# Altium PCB PCB1.PcbDoc
Units mil, origin at the board's own origin, x right, y up, seen from the top; angles counter-clockwise.
Board outline 1566.93 x 1488.19 mil, 4 copper layers (Top Layer, Int1 (GND), Int2 (PWR), Bottom Layer), stack 62.449 mil thick; 29 components, 72 nets, 226 pads, 76 vias.
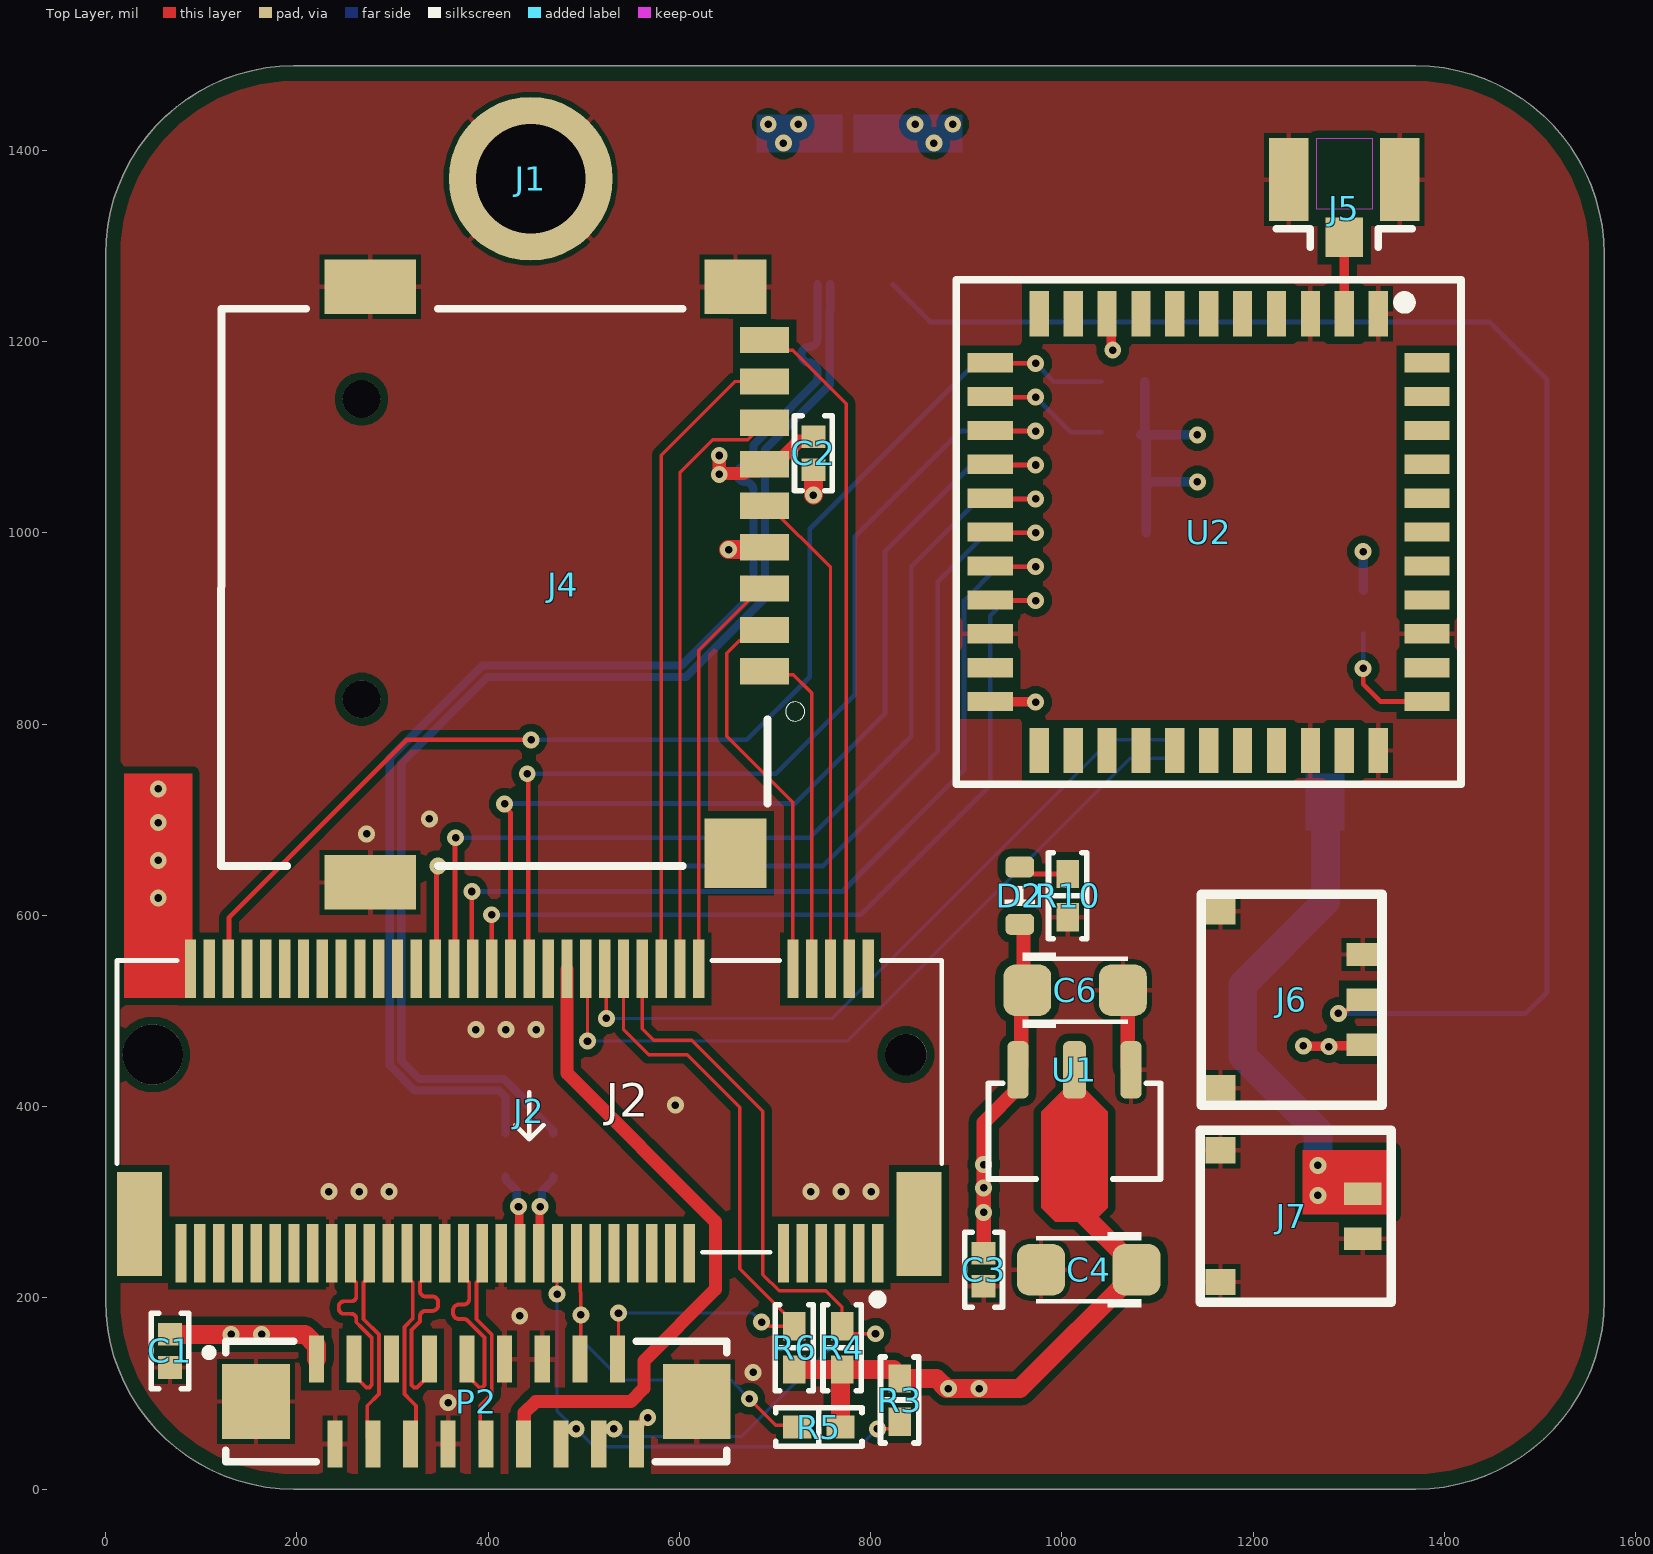
[diagram p0: Top Layer view]
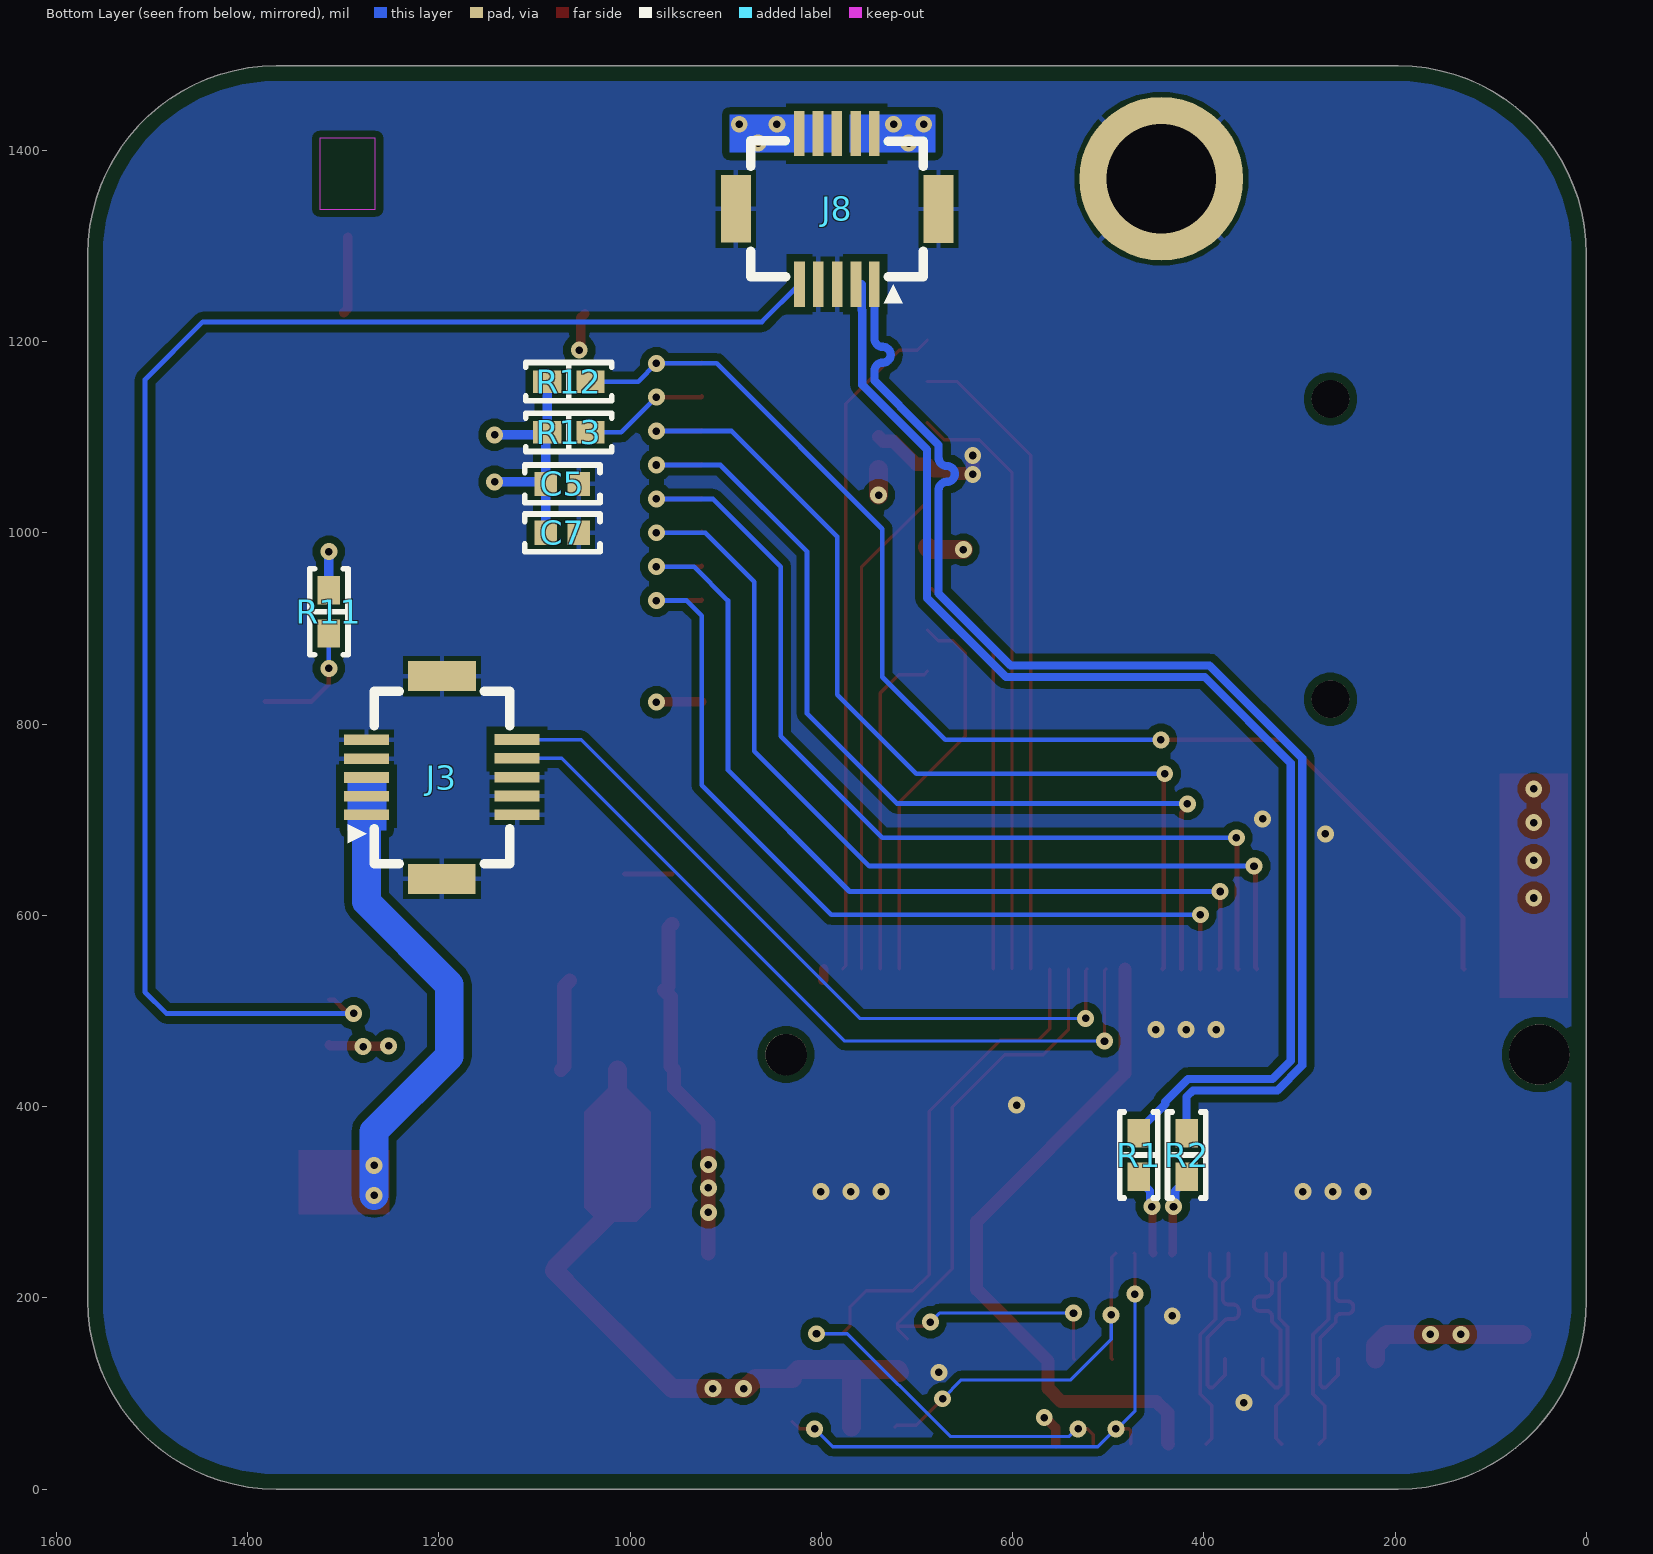
[diagram p1: Bottom Layer view, seen from below]
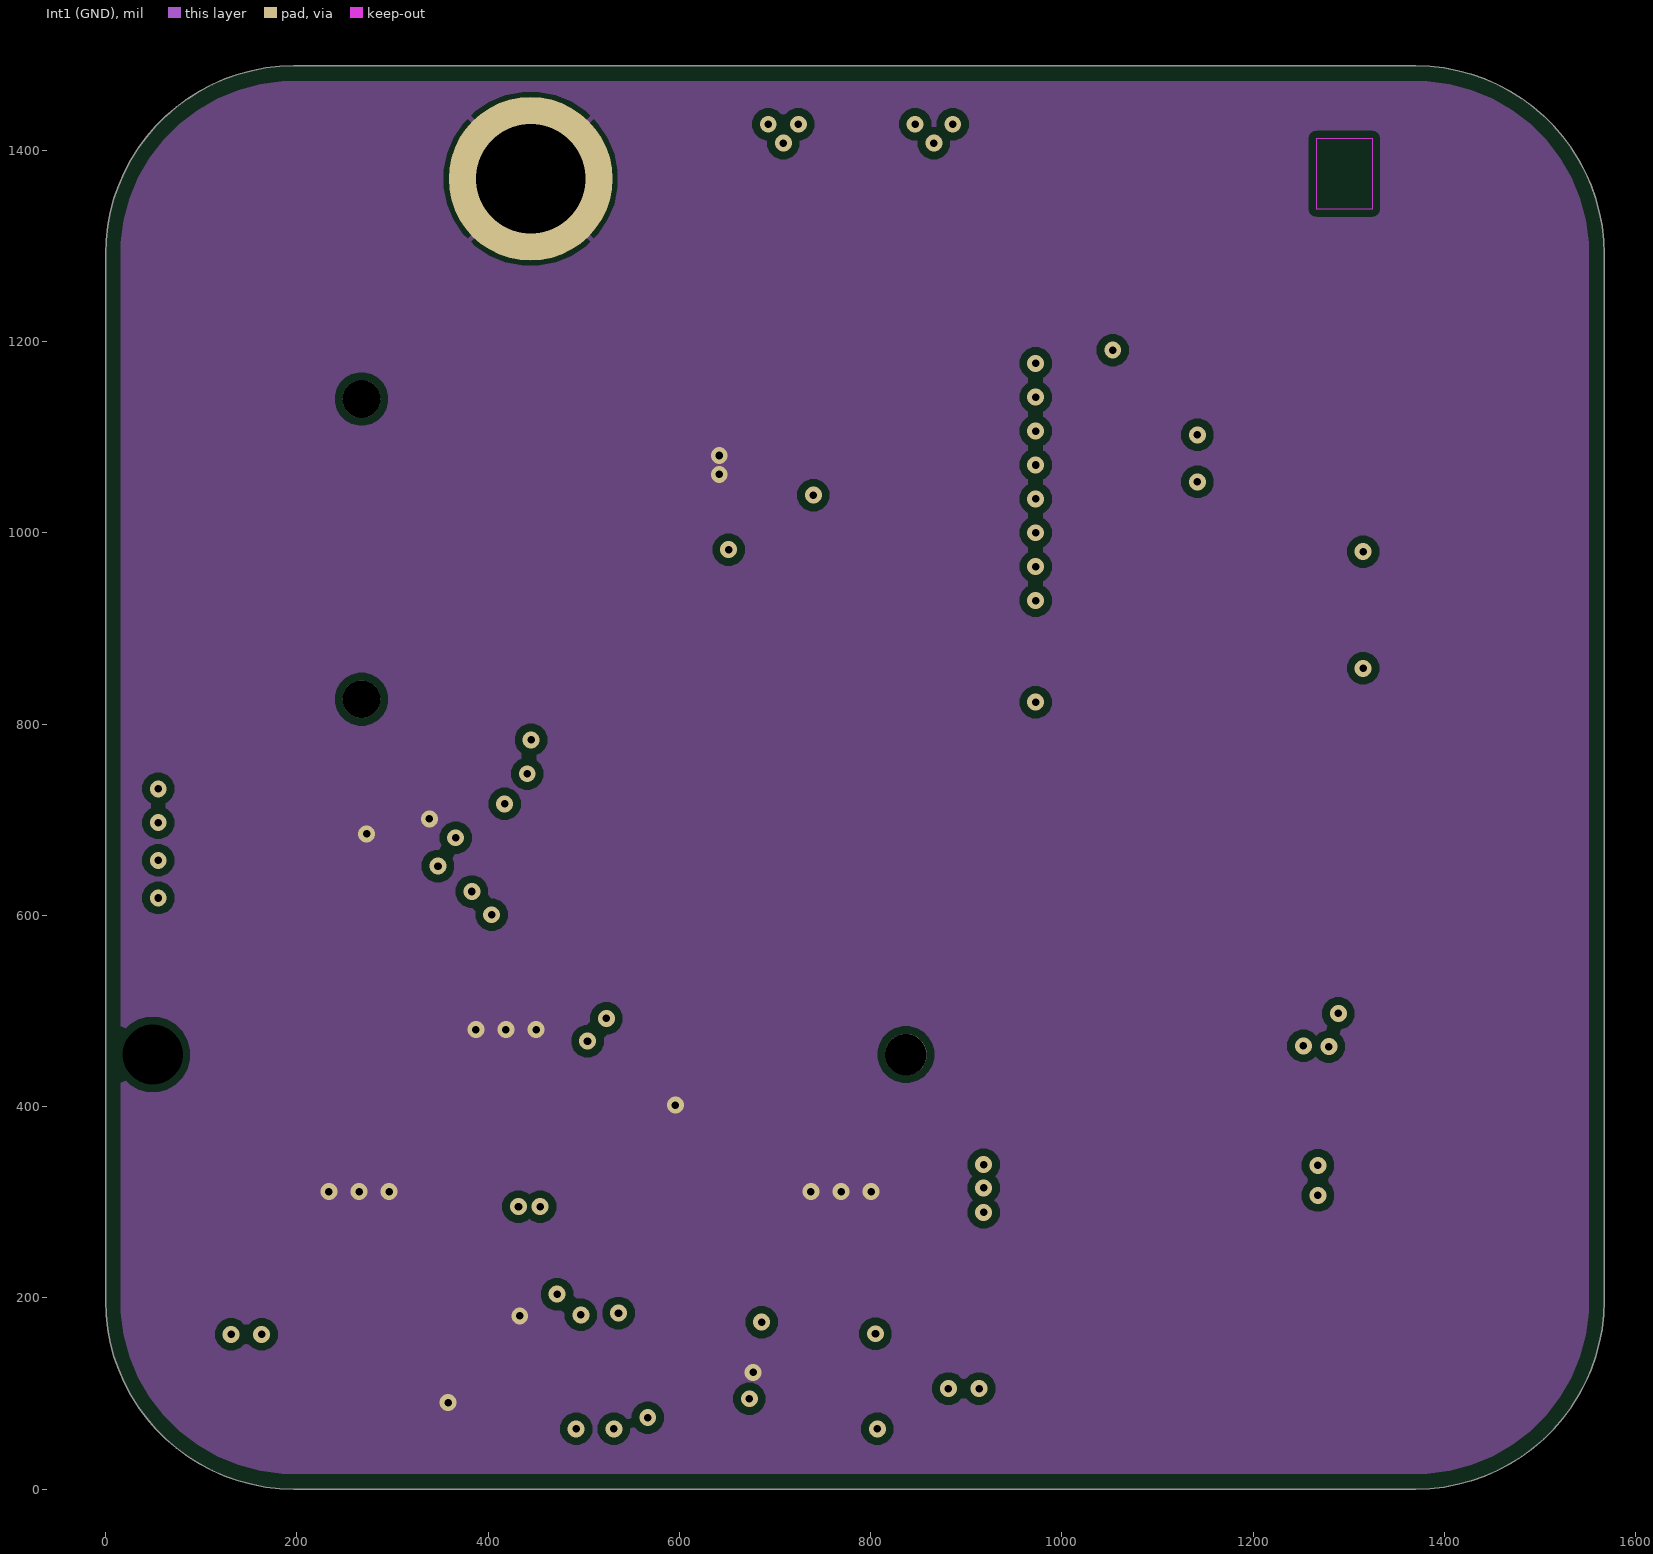
[diagram p2: Int1 (GND)]
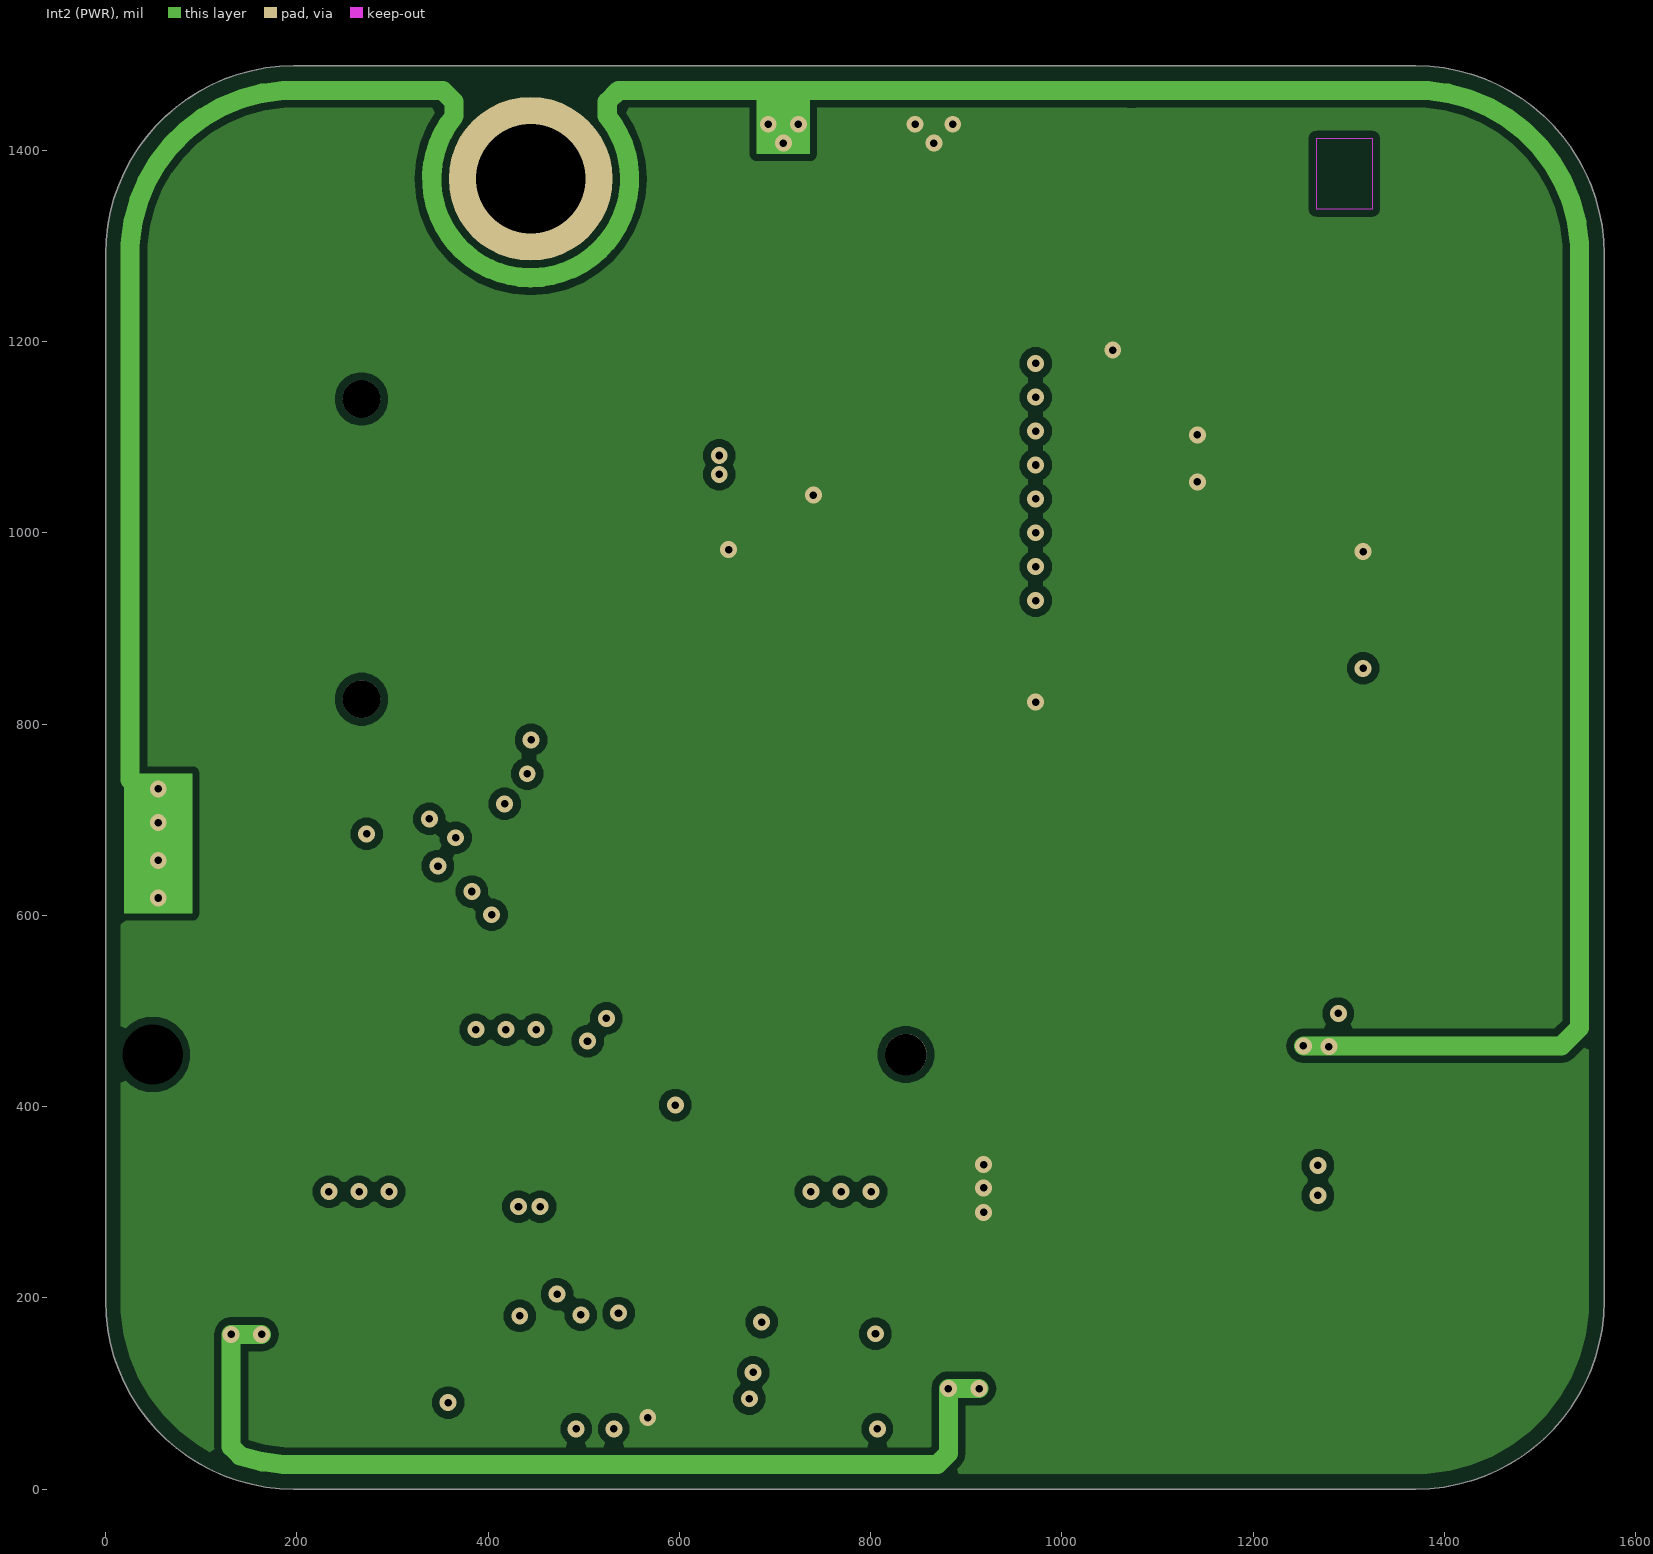
[diagram p3: Int2 (PWR)]

## Layer stack, top to bottom
Top Solder: solder mask 0.6, SM-001, Dk 3.8
Top Layer: signal copper 1.378
Dielectric 1: prepreg 8.284, PP-017, Dk 4.5
Int1 (GND): signal copper 0.598
Dielectric 2: core 41.929, Core-039, Dk 4.48
Int2 (PWR): signal copper 0.598
Dielectric 3: prepreg 8.284, PP-017, Dk 4.5
Bottom Layer: signal copper 1.378
Bottom Solder: solder mask 0.6, SM-001, Dk 3.8

## Board outline
0,196.85 0,1291.34 cw(c196.85,1291.34) 196.85,1488.19 1370.08,1488.19 cw(c1370.08,1291.34) 1566.93,1291.34 1566.93,196.85 cw(c1370.08,196.85) 1370.08,0 196.85,0 cw(c196.85,196.85)

## Design rules (kind name [scope] priority, off if disabled: settings)
BoardOutlineClearance [All] p1: gap=15.75 ignorepadtopadclearanceinfootprint=FALSE
Clearance [All] p1: gap=7.87 ignorepadtopadclearanceinfootprint=FALSE except(0: Arc-Text Track-Text SMDPad-Text THPad-Text Via-Text Fill-Text Poly-Text Region-Text Text-Text; 3.5: Arc-Arc Arc-Track Arc-SMDPad Track-Track Track-SMDPad SMDPad-SMDPad; 5: Arc-Via Track-Via SMDPad-Via THPad-Via Via-Via)
ComponentClearance [All] p1: gap=0 collisioncheckmode=3 verticalgap=100000 showdistances=FALSE checkcomponentboundary=TRUE
DiffPairsRouting USB [InDifferentialPairClass('USB')] p1: maxlimit=5 minlimit=5 mostfreqgap=5 toplayer_minwidth=8.56 toplayer_maxwidth=8.56 toplayer_prefwidth=8.56 midlayer1_minwidth=6.05 midlayer1_maxwidth=6.05 midlayer1_prefwidth=6.05 midlayer2_minwidth=6.05 midlayer2_maxwidth=6.05 midlayer2_prefwidth=6.05 bottomlayer_minwidth=8.56 bottomlayer_maxwidth=8.56 bottomlayer_prefwidth=8.56 impedanceprofiledriven=TRUE impedanceprofileid={9F585168-AD37-4EB0-BCD7-389F9EE76906} impedanceprofilevalue=90.000000 maxuncoupledlength=500
DiffPairsRouting MIPI [InDifferentialPairClass('MIPI')] p2: maxlimit=5 minlimit=3.5 mostfreqgap=5 toplayer_maxgap=3.5 toplayer_prefgap=3.5 toplayer_minwidth=4.01 toplayer_maxwidth=4.01 toplayer_prefwidth=4.01 midlayer1_mingap=5 midlayer1_minwidth=4.33 midlayer1_maxwidth=4.33 midlayer1_prefwidth=4.33 midlayer2_mingap=5 midlayer2_minwidth=4.33 midlayer2_maxwidth=4.33 midlayer2_prefwidth=4.33 bottomlayer_maxgap=3.5 bottomlayer_prefgap=3.5 bottomlayer_minwidth=4.01 bottomlayer_maxwidth=4.01 bottomlayer_prefwidth=4.01 impedanceprofiledriven=TRUE impedanceprofileid={22BA7DF4-EF47-42FE-BF8E-29151FD2DEE7} impedanceprofilevalue=100.000000 maxuncoupledlength=500
HoleSize [All] p1: absolutevalues=TRUE maxlimit=248.03 minlimit=7.87 maxpercent=80.000 minpercent=20.000
MatchedLengths MIPI_INNER_PAIR [InDifferentialPairClass('MIPI')] p1: tolerance=1000 checknetsindiffpair=TRUE checkdiffpairvsdiffpair=FALSE checkxsignals=FALSE checkothers=FALSE usedelayunits=TRUE delaytolerance=1.000000
MatchedLengths MIPI_INTRA_PAIR [InDifferentialPairClass('MIPI')] p2: tolerance=1000 checknetsindiffpair=FALSE checkdiffpairvsdiffpair=TRUE checkxsignals=TRUE checkothers=TRUE usedelayunits=TRUE delaytolerance=1.000000
MinimumSolderMaskSliver [All] p1: minsoldermaskwidth=3.94
PlaneClearance [All] p1: clearance=5
PlaneConnect [All] p1: pad.planeconnectstyle=Relief pad.reliefexpansion=5 pad.reliefentries=4 pad.reliefconductorwidth=5 pad.reliefairgap=5 via.planeconnectstyle=Direct via.reliefexpansion=20 via.reliefentries=4 via.reliefconductorwidth=10 via.reliefairgap=10
PolygonConnect [All] p1: thpad.connectstyle=Relief thpad.reliefconductorwidth=5 thpad.reliefentries=4 thpad.polygonreliefangle="45 Angle" thpad.airgapwidth=5 smdpad.connectstyle=Relief smdpad.reliefconductorwidth=5 smdpad.reliefentries=4 smdpad.polygonreliefangle="90 Angle" smdpad.airgapwidth=5 via.connectstyle=Direct via.reliefconductorwidth=10 via.reliefentries=4 via.polygonreliefangle="90 Angle" via.airgapwidth=10
RoutingVias [All] p1: holewidth=7.87 width=11.81 viastyle="Through Hole" minholewidth=7.87 minwidth=11.81 maxholewidth=39.37 maxwidth=78.74 useviatemplates=TRUE viatemplateguid#1={F701D0FB-8AA5-4961-8F3C-595B0EFB5A3B} viatemplatename#1=v45h20m0mx0(Tol13-8)
SilkToSilkClearance [All] p1: silktosilkclearance=5.91
SolderMaskExpansion [All] p1: expansion=4 istentingtop=FALSE
Width MIPI_CLK [InNet('MCSI-MCLK')] p1: maxlimit=13.83 minlimit=10.58 preferedwidth=13.83 toplayer_minwidth=13.83 midlayer1_maxwidth=10.58 midlayer1_prefwidth=10.58 midlayer2_maxwidth=10.58 midlayer2_prefwidth=10.58 bottomlayer_minwidth=13.83 impedanceprofiledriven=TRUE impedanceprofileid={A6AE610F-273C-4D2F-8FC4-F4028CCF98C5} impedanceprofilevalue=50.000000 minimp=50.000000 maximp=50.000000 favimp=50.000000
Width [All] p2: maxlimit=100 minlimit=3.5 preferedwidth=5 minimp=50.000000 maximp=50.000000 favimp=50.000000
23 further rules are at their usual default settings.

## Classes and differential pairs
net class ANT_50: NetJ5_1
differential pair class MIPI: MCSI-CK MCSI-D0 MCSI-D1
differential pair USB0: +USB0_P -USB0_N
differential pair USB0_: +USB0__P -USB0__N
differential pair MCSI-D1: +MCSI-D1_P -MCSI-D1_N
differential pair MCSI-D0: +MCSI-D0_P -MCSI-D0_N
differential pair MCSI-CK: +MCSI-CK_P -MCSI-CK_N

## Components (designator, comment, footprint, x,y, rotation, side; value= is the part's Value field where it differs from the comment)
C1 "10 µF" "CAP 0402_1005" 67.37,144.51 r270 top
C2 "10 µF" "CAP 0402_1005" 740.1,1083.16 r90 top
C3 "10 µF" "CAP 0402_1005" 918.13,229.38 r270 top
C4 "22 µF" CAP_TAN_A1206 1028.13,229.38 r180 top
C5 "10 µF" "CAP 0402_1005" 1070.87,1051.18 r180 bottom
C6 "22 µF" CAP_TAN_A1206 1013.78,521.65 r0 top
C7 "10 µF" "CAP 0402_1005" 1070.87,1000 r180 bottom
D2 "Red" LED_0603_RED 956,620.54 r90 top
J1 "Socket" "M.2 SMT-FEMALE - FULL" 444.51,1370.12 r0 top
J2 "NGFF-67P_B-KEY座子 4.2H高" M2-67P0R50_B_FEMALE 443.13,454.38 r180 top locked
J3 "BTB_10P_FEMALE" BTB_10P_FEMALE 1196.85,744.09 r270 bottom locked
J4 "TF-01A" TF-01A 406.66,942.85 r270 top locked
J5 "IPEX" IPEX 1295.21,1369.21 r0 top
J6 "BM03B" BM03B 1240.16,511.81 r270 top
J7 "BM02B" BM02B 1240.16,285.43 r270 top
J8 "BTB_10P_FEMALE" BTB_10P_FEMALE 783.46,1338.58 r180 bottom locked
P2 "FPC 18pin 0.5" "FPC 18PIN STAND" 387.73,91.62 r0 top locked
R1 "22 Ohms" "RES 0402_1005" 468.13,349.38 r90 bottom
R2 "22 Ohms" "RES 0402_1005" 418.13,349.38 r90 bottom
R3 "1.5 kOhms" "RES 0402_1005" 830.37,93.18 r270 top
R4 "10 kOhms" "RES 0402_1005" 770.1,147.73 r90 top
R5 "1.5 kOhms" "RES 0402_1005" 745.89,64.96 r180 top
R6 "10 kOhms" "RES 0402_1005" 720.1,147.73 r90 top
R10 "10 kOhms" "RES 0402_1005" 1006,620.54 r270 top
R11 "10 kOhms" "RES 0402_1005" 1314.96,917.32 r90 bottom
R12 "10 kOhms" "RES 0402_1005" 1064,1158 r180 bottom
R13 "10 kOhms" "RES 0402_1005" 1064,1105 r180 bottom
U1 "AMS1117-1.8" SOT89-3 1013.13,374.38 r270 top
U2 "RTL8189FTV" FT89FMST13 1153.48,1000.69 r270 top locked

## Footprints (in the part's own frame and the unit in brackets; to place one, negate y for a bottom-side part, rotate by r counter-clockwise, add the part's x,y. Pads: shape width x height; smd on the part's side, far side on the other; paste and mask are expansions set on the pad)
BM02B [mm]
  rect 0.6x1 smd mask+0.051: 1(-0.6,1.888) 2(0.6,1.888)
  rect 0.7x0.8 smd mask+0.051: 3(1.75,-1.888) 4(-1.75,-1.888)
  silkscreen extent -2.29,-2.43 2.29,2.65, body extent -2.1,-2.3 2.1,2.2, height 1.4
BM03B [mm]
  rect 0.6x0.85 smd mask+0.051: 1(-1.2,1.888) 2(0,1.887) 3(1.2,1.888)
  rect 0.7x0.8 smd mask+0.051: 4(-2.35,-1.887) 5(2.35,-1.887)
  silkscreen extent -2.8,-2.4 2.8,2.4, body extent -2.7,-2.3 2.7,2.2, height 1.4
BTB_10P_FEMALE [mm]
  rect 0.28x1.2 smd mask+0.051: 1(0.991,-2) 2(0.991,2) 3(0.5,-2) 4(0.491,2) 5(0,-2) 6(-0.009,2) 7(-0.5,-2) 8(-0.509,2) 9(-1,-2) 10(-1.009,2)
  rect 0.8x1.8 smd mask+0.051: 11(-2.691,0.003) 12(2.691,0.001)
  silkscreen extent -2.29,-2.5 2.29,1.81, body extent -2.3,-1.8 2.3,1.8, height 2.2
"CAP 0402_1005" [mm] "Chip Capacitor, 2-Leads, Body 1.02x0.51mm, IPC Medium Density"
  rect 0.6x0.64 smd: 1(-0.44,0) 2(0.44,0)
  silkscreen extent -1,-0.5 1,0.5, body extent -0.5,-0.26 0.5,0.26, height 0.52
CAP_TAN_A1206 [mil]
  rrect50% 50x54 smd: 1(-50,0) 2(50,0)
  silkscreen extent -55,-39 55,39, body extent -63,-31 63,32, height 71
"FPC 18PIN STAND" [mm] "HDGC 0.5K-A-18PBF"
  rect 0.4x1.25 smd: 1(-4.25,1.125) 2(-3.75,-1.125) 3(-3.25,1.125) 4(-2.75,-1.125) 5(-2.25,1.125) 6(-1.75,-1.125) 7(-1.25,1.125) 8(-0.75,-1.125) 9(-0.25,1.125) 10(0.25,-1.125) 11(0.75,1.125) 12(1.25,-1.125) 13(1.75,1.125) 14(2.25,-1.125) 15(2.75,1.125) 16(3.25,-1.125) 17(3.75,1.125) 18(4.25,-1.125)
  rect 1.8x2 smd: MH(-5.85,0) MH(5.85,0)
  silkscreen extent -7.2,-1.6 6.65,1.6, body extent -7.4,-1 7.4,1, height 4.5
FT89FMST13 [mm] "wifi module"
  rect 1.2x0.51 smd: 1(-5.8,4.5) 2(-5.8,3.6) 3(-5.8,2.7) 4(-5.8,1.8) 5(-5.8,0.9) 6(-5.8,0) 7(-5.8,-0.9) 8(-5.8,-1.8) 9(-5.8,-2.7) 10(-5.8,-3.6) 11(-5.8,-4.5) 23(5.8,-4.5) 24(5.8,-3.6) 25(5.8,-2.7) 26(5.8,-1.8) 27(5.8,-0.9) 28(5.8,0) 29(5.8,0.9) 30(5.8,1.8) 31(5.8,2.7) 32(5.8,3.6) 33(5.8,4.5)
  rect 0.51x1.2 smd: 12(-4.5,-5.8) 13(-3.6,-5.8) 14(-2.7,-5.8) 15(-1.8,-5.8) 16(-0.9,-5.8) 17(0,-5.8) 18(0.9,-5.8) 19(1.8,-5.8) 20(2.7,-5.8) 21(3.6,-5.8) 22(4.5,-5.8) 34(4.5,5.8) 35(3.6,5.8) 36(2.7,5.8) 37(1.8,5.8) 38(0.9,5.8) 39(0,5.8) 40(-0.9,5.8) 41(-1.8,5.8) 42(-2.7,5.8) 43(-3.6,5.8) 44(-4.5,5.8)
  silkscreen extent -6.7,-6.7 6.7,6.7, body extent -6,-6 6,6, height 2.6
IPEX [mm]
  rect 1x1.05 smd: 1(0,-1.525)
  rect 1.05x2.2 smd: 2(-1.475,0) 2(1.475,0)
  Keep-Out Layer region: -0.737,1.1 0.737,1.1 0.737,-0.787 -0.737,-0.787
  silkscreen extent -1.8,-1.8 1.8,-1.3, body extent -1.3,-1.3 1.3,1.3, height 1.25
LED_0603_RED [mil]
  rrect50% 22x30 smd: 1(-30,0) 2(30,0)
  silkscreen extent -10,-16 10,16, body extent -32,-16 32,16, height 24
M2-67P0R50_B_FEMALE [mm]
  rect 0.3x1.55 smd mask+0.051: 1(-9.25,5.275) 2(-9,-2.275) 3(-8.75,5.275) 4(-8.5,-2.275) 5(-8.25,5.275) 6(-8,-2.275) 7(-7.75,5.275) 8(-7.5,-2.275) 9(-7.25,5.275) 10(-7,-2.275) 11(-6.75,5.275) 20(-4.5,-2.275) 21(-4.25,5.275) 22(-4,-2.275) 23(-3.75,5.275) 24(-3.5,-2.275) 25(-3.25,5.275) 26(-3,-2.275) 27(-2.75,5.275) 28(-2.5,-2.275) 29(-2.25,5.275) 30(-2,-2.275) 31(-1.75,5.275) 32(-1.5,-2.275) 33(-1.25,5.275) 34(-1,-2.275) 35(-0.75,5.275) 36(-0.5,-2.275) 37(-0.25,5.275) 38(0,-2.275) 39(0.25,5.275) 40(0.5,-2.275) 41(0.75,5.275) 42(1,-2.275) 43(1.25,5.275) 44(1.5,-2.275) 45(1.75,5.275) 46(2,-2.275) 47(2.25,5.275) 48(2.5,-2.275) 49(2.75,5.275) 50(3,-2.275) 51(3.25,5.275) 52(3.5,-2.275) 53(3.75,5.275) 54(4,-2.275) 55(4.25,5.275) 56(4.5,-2.275) 57(4.75,5.275) 58(5,-2.275) 59(5.25,5.275) 60(5.5,-2.275) 61(5.75,5.275) 62(6,-2.275) 63(6.25,5.275) 64(6.5,-2.275) 65(6.75,5.275) 66(7,-2.275) 67(7.25,5.275) 68(7.5,-2.275) 69(7.75,5.275) 70(8,-2.275) 71(8.25,5.275) 72(8.5,-2.275) 73(8.75,5.275) 74(9,-2.275) 75(9.25,5.275)
  round 1.1 hole 1.1 mask+0.051: " "(-10,0)
  round 1.6 / inner round 1.524 / far side round 1.6 hole 1.6 mask+0.051: " "(10,0)
  rect 1.2x2.75 smd mask+0.051: SH1(-10.35,4.5) SH2(10.35,4.5)
  silkscreen extent -10.95,-2.5 10.95,6.62, body extent -10.95,-2.85 10.95,5.85, height 4.09
"M.2 SMT-FEMALE - FULL" [mm] "Connector; Plug"
  round 4.35 hole 2.9 paste+0 mask+0.051: 1(0,0)
  body extent -2.26,-2.24 2.24,2.26, height 2.46
"RES 0402_1005" [mm] "Chip Resistor, 2-Leads, Body 1.0x0.5mm, IPC Medium Density"
  rect 0.75x0.6 smd: 1(-0.575,0) 2(0.575,0)
  silkscreen extent -1.14,-0.51 1.14,0.51, body extent -0.5,-0.25 0.5,0.25, height 0.35
SOT89-3 [mil]
  rrect50% 60x22 smd: 1(-64,59.06) 3(-64,-59.06)
  rrect50% 60x24 smd: 2(-64,0)
  Top Layer region: -45,10 -20,35 80,35 95,20 95,-20 80,-35 -20,-35 -45,-10
  silkscreen extent -50,-90 50,90, body extent -83,-88 75,88, height 60
TF-01A [mm]
  rect 0.7x1.3 smd: 1(2.23,7.174) 2(1.13,7.174) 3(0.03,7.174) 4(-1.07,7.174) 5(-2.17,7.174) 6(-3.27,7.174) 7(-4.37,7.174) 8(-5.47,7.174) CD1(-6.57,7.174)
  rect 1.448x1.651 smd: MP1(-7.989,6.4)
  rect 1.448x2.438 smd: MP2(-7.989,-3.3) MP3(7.836,-3.3)
  rect 1.854x1.651 smd: MP4(7.061,6.4)
  round 1 hole 1 unplated: ""(-5.004,-3.531) ""(2.972,-3.531)
  silkscreen extent -7.4,-7.26 7.4,8.24, body extent -8.07,-7.69 8.03,7.51, height 2

## Part data
C1 C2 C3 C5 C7: library part GRM155R60E106ME16D, "CAP CER 10UF 2.5V X5R 0402", Device Package="0402 (1005 Metric)", manufacturer="Murata Electronics", Operating Temperature="-55°C ~ 85°C", Supplier Part Number 1=490-10692-1-ND, Temperature Coefficient=X5R, Tolerance=±20%, Voltage - Rated=2.5V, Applications="General Purpose", Capacitance="10 µF", componentlink1description=Datasheet, componentlink1url=https://search.murata.co.jp/Ceramy/image/img/A01X/G101/ENG/GRM155R60E106ME16-01.pdf, componentlink2description="DigiKey Link", componentlink2url=https://www.digikey.com/en/products/detail/murata-electronics/GRM155R60E106ME16D/4905100, lastupdated="2022/9/14 7:46:00", Lifecycle Status=Active, Minimum Order=1, Mounting Type="Surface Mount, MLCC", Package / Case="0402 (1005 Metric)", packaging=TapeAndReel, Part Number=GRM155R60E106ME16D, Part Status=Active, partid=6704, Price=0.02, series=GRM, Size / Dimension="0.039\" L x 0.020\" W (1.00mm x 0.50mm)", Supplier 1=DigiKey, Thickness (Max)="0.028\" (0.70mm)"
C4 C6: library part GRM155R60E106ME16D, "CAP CER 10UF 2.5V X5R 0402", Capacitance="10 µF", Device Package="0402 (1005 Metric)", manufacturer="Murata Electronics", Operating Temperature="-55°C ~ 85°C", Supplier Part Number 1=490-10692-1-ND, Temperature Coefficient=X5R, Tolerance=±20%, Voltage - Rated=2.5V, Applications="General Purpose", componentlink1description=Datasheet, componentlink1url=https://search.murata.co.jp/Ceramy/image/img/A01X/G101/ENG/GRM155R60E106ME16-01.pdf, componentlink2description="DigiKey Link", componentlink2url=https://www.digikey.com/en/products/detail/murata-electronics/GRM155R60E106ME16D/4905100, lastupdated="2022/9/14 7:46:00", Lifecycle Status=Active, Minimum Order=1, Mounting Type="Surface Mount, MLCC", Package / Case="0402 (1005 Metric)", packaging=TapeAndReel, Part Number=GRM155R60E106ME16D, Part Status=Active, partid=6704, Price=0.02, series=GRM, Size / Dimension="0.039\" L x 0.020\" W (1.00mm x 0.50mm)", Supplier 1=DigiKey, Thickness (Max)="0.028\" (0.70mm)"
D2: library part QBLP595-R-2897, "0402 LED RED, CLEAR LENS, 330MCD", Current - Test=20mA, Device Package="0402 (1005 Metric)", Lens Color=Colorless, manufacturer="QT Brightek (QTB)", Millicandela Rating=330mcd, Supplier Device Package=0402, Supplier Part Number 1=1516-QBLP595-R-2897CT-ND, Voltage - Forward (Vf) (Typ)=2.1V, Color=Red, componentlink1description=Datasheet, componentlink1url=https://www.qt-brightek.com/datasheet/QBLP595-R-2897.pdf, componentlink2description="DigiKey Link", componentlink2url=https://www.digikey.com/en/products/detail/qt-brightek-qtb/QBLP595-R-2897/16499677, Configuration=Standard, Height (Max)=0.60mm, lastupdated="2022/9/14 8:36:36", Lens Size="0.70mm x 0.50mm", Lens Style="Rectangle with Flat Top", Lens Transparency=Clear, Lifecycle Status=Active, Minimum Order=1, Mounting Type="Surface Mount", Package / Case="0402 (1005 Metric)", packaging=TapeAndReel, Part Number=QBLP595-R-2897, Part Status=Active, partid=1086, Price=0.07, series=QBLP595, Size / Dimension="1.00mm L x 0.50mm W", Supplier 1=DigiKey, Viewing Angle=120°, Wavelength - Dominant=620nm
J2: library part NGFF-67P_B-MALE
J4: "<b>Connector - Card Sockets 8 1.1mm SMD RoHS</b><p> Source: <a href=\"https://datasheet.lcsc.com/szlcsc/1903221101_Korean-Hroparts-Elec-TF-01A_C91145.pdf\"> Datasheet </a>", Package=None, Availability=Unavailable, MF="{'manufacturer': u'HRO Electronics Co., Ltd.'}", MP=TF-01A, Price=None
R1 R2: library part SR0402FR-7W22RL, "RES 22 OHM 1% 1/8W 0402", Device Package="0402 (1005 Metric)", manufacturer=Yageo, Operating Temperature="-55°C ~ 155°C", Power (Watts)="0.125W, 1/8W", Ratings=AEC-Q200, Supplier Device Package=0402, Supplier Part Number 1=YAG5820CT-ND, Temperature Coefficient=±100ppm/°C, Tolerance=±1%, componentlink1description=Datasheet, componentlink1url=http://www.yageo.com/documents/recent/PYu-SR_D_F%20tol_RoHS_L_4.pdf, componentlink2description="DigiKey Link", componentlink2url=https://www.digikey.com/en/products/detail/yageo/SR0402FR-7W22RL/9373094, Composition="Thick Film", Features="Automotive AEC-Q200, Pulse Withstanding", Height - Seated (Max)="0.016\" (0.40mm)", lastupdated="2022/9/14 8:02:27", Lifecycle Status=Active, Minimum Order=1, Number of Terminations=2, Package / Case="0402 (1005 Metric)", packaging=TapeAndReel, Part Number=SR0402FR-7W22RL, Part Status=Active, partid=4390, Price=0.07, Resistance="22 Ohms", series=SR, Size / Dimension="0.039\" L x 0.020\" W (1.00mm x 0.50mm)", Supplier 1=DigiKey
R3 R5: library part PTN0402Y1501BST1, "PTN0402 10PPM 1.5K 0.1% S T1 E1", Device Package="0402 (1005 Metric)", manufacturer="Vishay Dale Thin Film", Operating Temperature="-55°C ~ 155°C", Power (Watts)="0.05W, 1/20W", Supplier Device Package=0402, Supplier Part Number 1=764-PTN0402Y1501BST1CT-ND, Temperature Coefficient=±10ppm/°C, Tolerance=±0.1%, componentlink1description=Datasheet, componentlink1url=https://www.vishay.com/docs/60026/ptn.pdf, componentlink2description="DigiKey Link", componentlink2url=https://www.digikey.com/en/products/detail/vishay-dale-thin-film/PTN0402Y1501BST1/12820654, Composition="Thin Film", Features="Anti-Sulfur, Moisture Resistant, Non-Inductive", Height - Seated (Max)="0.033\" (0.84mm)", lastupdated="2022/9/14 8:01:19", Lifecycle Status=Active, Minimum Order=1, Number of Terminations=2, Package / Case="0402 (1005 Metric)", packaging=TapeAndReel, Part Number=PTN0402Y1501BST1, Part Status=Active, partid=59552, Price=0.27, Resistance="1.5 kOhms", series=PTN, Size / Dimension="0.042\" L x 0.022\" W (1.07mm x 0.56mm)", Supplier 1=DigiKey
R4 R6 R11 R12 R13: library part P2TC0402D1002LNTA, "P2TC0402 2PPM/C 10K 0,01% N TA", Device Package="0402 (1005 Metric)", manufacturer="Vishay Sfernice", Operating Temperature="-55°C ~ 155°C", Power (Watts)="0.063W, 1/16W", Supplier Device Package=0402, Supplier Part Number 1=716-P2TC0402D1002LNTACT-ND, Temperature Coefficient=±2ppm/°C, Tolerance=±0.01%, componentlink1description=Datasheet, componentlink1url=https://www.vishay.com/docs/53080/p2tc.pdf, componentlink2description="DigiKey Link", componentlink2url=https://www.digikey.com/en/products/detail/vishay-sfernice/P2TC0402D1002LNTA/11657715, Composition="Thin Film", Features="Anti-Sulfur, Moisture Resistant", Height - Seated (Max)="0.025\" (0.63mm)", lastupdated="2022/9/14 8:01:18", Lifecycle Status=Active, Minimum Order=1, Number of Terminations=2, Package / Case="0402 (1005 Metric)", packaging=TapeAndReel, Part Number=P2TC0402D1002LNTA, Part Status=Active, partid=59061, Price=13.14, Resistance="10 kOhms", series=P2TC, Size / Dimension="0.039\" L x 0.024\" W (1.00mm x 0.60mm)", Supplier 1=DigiKey
R10: library part RP73PF1E10KBTD, "RES 10K OHM 0.1% 1/10W 0402", Device Package="0402 (1005 Metric)", manufacturer="TE Connectivity Passive Product", Operating Temperature="-55°C ~ 155°C", Power (Watts)="0.1W, 1/10W", Supplier Device Package=0402, Supplier Part Number 1=A127415CT-ND, Temperature Coefficient=±25ppm/°C, Tolerance=±0.1%, componentlink1description=Datasheet, componentlink1url=https://www.te.com/commerce/DocumentDelivery/DDEController?Action=srchrtrv&DocNm=1773272&DocType=DS&DocLang=English, componentlink2description="DigiKey Link", componentlink2url=https://www.digikey.com/en/products/detail/te-connectivity-passive-product/RP73PF1E10KBTD/8260957, Composition="Thin Film", Height - Seated (Max)="0.014\" (0.35mm)", lastupdated="2022/9/14 8:02:33", Lifecycle Status=Active, Minimum Order=1, Number of Terminations=2, Package / Case="0402 (1005 Metric)", packaging=TapeAndReel, Part Number=RP73PF1E10KBTD, Part Status=Active, partid=2434, Price=0.09, Resistance="10 kOhms", series="RP73, Holsworthy", Size / Dimension="0.039\" L x 0.020\" W (1.00mm x 0.50mm)", Supplier 1=DigiKey
U1: library part AMS1117, "Sot223/Pkg 1-Amp 5-Volt Low Drop Out Voltage Regulatator", Package=None, Availability=Unavailable, MF="{'manufacturer': u'Advanced Monolithic Systems'}", MP=AMS1117, Price=None
J1: LatestRevisionDate=17-Jul-2002, LatestRevisionNote="Re-released for DXP Platform.", Publisher="Altium Limited"

## Via types
v1: diameter 17.72, hole 7.87, Top Layer to Bottom Layer, tented both sides, 76 vias

## Nets (pads, with @x,y where several pads share a name; then routed paths per layer and width w, separated by ;. In a path a pad name is that pad's centre, name@x,y a point inside that pad or via, vN(x,y) a via of type N, cw(c..) or ccw(c..) an arc to the next point about the centre after c; other vN are vias at no path point)
1V8: C1.1 C4.1 P2.1 R3.1 R4.1 R5.1 R6.1 U1.2 | length 1916.7
  Top Layer w20: C1.1 v1(131.29,161.83) v1(163.25,161.83) 208.7,161.83 220.41,150.11 P2.1 ; R6.1@718.29,122.05 720.1,123.86 R6.1 R4.1 ; R5.1 768.53,123.52 R4.1 ; U1.2 1013.13,296.38 1078.13,231.38 C4.1 1078.13,228 C4.1@1068.13,218 ; C4.1@1078.74,228.35 1078.74,227.99 955.93,105.18 v1(913.37,105.18) v1(881.37,105.18) 879.28,105.18 868.65,115.82 R3.1 830.37,118.28 823.56,125.09 R4.1
  Int2 (PWR) w20: v1(163.25,161.83) v1(131.29,161.83) 131.29,44.34 140.74,34.89 141.73,34.48 163.4,28.68 185.64,25.75 869.66,25.75 881.37,37.46 v1(881.37,105.18) v1(913.37,105.18)
3V3: C2.1 C3.1 C5.1 C6.1 C7.1 D2.1 J4.4 J8.6 J8.8 J8.10 P2.18 R11.2 R12.1 R13.1 U1.3 U2.9 U2.22 | length 866
  Top Layer w10: P2.18 555.06,64.07 565.79,74.8 v1(566.93,74.8) ; U2.22 925.48,823.18 972.09,823.18 v1(972.44,822.83) ; U2.9 1051.67,1224.55 1051.67,1192.42 v1(1053.15,1190.94)
  Top Layer w15: C3.1 918.13,383.44 954.07,419.38 U1.3 957.57,441.88 957.57,514.66 C6.1@964.57,521.65 ; D2.1 956.39,590.54 959.89,587.04 959.89,525.54 C6.1
  Top Layer w20: v1(651.51,982.37) 686.47,982.37 J4.4 ; C2.1 740.16,1065.78 v1(740.16,1039.37)
  Bottom Layer w10: R12.1 1086.64,1106.32 1082.68,1102.36 1084.02,1102.36 1088.19,1098.19 C5.1 ; R13.1@1087.29,1105.65 R13.1 1089.28,1102.36 v1(1141.73,1102.36) ; C7.1 1088.19,1048.82 1092.52,1053.15 v1(1141.73,1053.15) ; R11.2 v1(1314.96,980.32)
  other v1: 918.13,289.38 918.13,315.07 918.13,339.38 866.14,1407.48 846.46,1427.17 885.83,1427.17
5V: J2.74 J6.3 J8.2 J8.4 | length 3958.5
  Top Layer w10: v1(1252.48,463.53) 1252.84,463.16 1278.68,463.16 v1(1279.04,462.79) 1279.93,463.68 1313.59,463.68 J6.3
  Top Layer w20: 43.72,590.14 43.72,606.71 v1(55.12,618.11) v1(55.12,657.48) v1(55.12,696.85) v1(55.12,732.28)
  Int2 (PWR) w20: v1(55.12,732.28) 52.79,729.95 45.75,729.95 37.46,729.95 31.61,735.81 25.75,741.67 25.75,1302.56 25.92,1303.85 26.16,1305.71 28.67,1324.79 29.01,1326.06 34.48,1346.46 43.06,1367.18 53.62,1385.47 54.28,1386.6 55.08,1387.64 67.93,1404.4 83.79,1420.26 101.59,1433.91 121.01,1445.13 141.73,1453.71 163.4,1459.51 185.64,1462.44 352.67,1462.44 358.49,1456.62 cw(c344.39,1442.44) 358.57,1456.54 364.39,1450.73 364.39,1442.44 364.39,1435.65 ccw(c444.51,1370.12) 524.62,1435.66 524.62,1442.44 524.62,1450.73 536.34,1462.44 1072.33,1462.44 ccw(c1072.81,2612.12) 1072.81,1462.44 1072.87,1462.44 1381.29,1462.44 1382.59,1462.27 1403.53,1459.51 1425.2,1453.71 1445.92,1445.13 1465.34,1433.91 1483.14,1420.26 1499,1404.4 1512.65,1386.6 1523.87,1367.18 1532.45,1346.46 1538.25,1324.79 1541.18,1302.55 1541.18,482.28 1522.42,463.53 v1(1252.48,463.53)
  other v1: 708.66,1407.48 692.91,1427.17 724.41,1427.17
AP-RESET: J2.2 | length 12.3
  Top Layer w10: J2.2 797.46,532.88 J2.2@798.36,531.98
BAT: J3.1 J3.3 J3.5 J7.1 | length 485.8
  Bottom Layer w30: v1(1267.72,307.09) v1(1267.72,338.58) 1267.72,374.02 1188.98,452.76 1188.98,527.56 1275.59,614.17 J3.1 J3.3
CPUX-RX: J2.58
CPUX-TX: J2.60
GND: C1.2 C2.2 C3.2 C4.2 C5.2 C6.2 C7.2 J1.1 J2.41 J2.47 J2.53 J2.59 J3.2 J3.4 J3.6 J3.7 J3.9 J3.11 J3.12 J4.6 J4.MP1 J4.MP2 J4.MP3 J5.2 J6.1 J6.4 J6.5 J7.2 J7.3 J7.4 J8.5 J8.7 J8.11 J8.12 P2.2 P2.8 P2.11 P2.13 P2.MH R10.2 U1.1 U2.1 U2.3 U2.20 U2.31 U2.33 U2.36 | length 231.2
  Top Layer w13.83: v1@640.62,1080.8 v1(641.67,1080.8) 641.67,1062.16 641.98,1061.86 667.53,1061.86 670.41,1064.74 682.22,1064.74 J4.6 700.9,1071.6 724.89,1095.59 735.2,1095.59 C2.2
  Top Layer w15: C6.2@1062.99,531.5 1068.68,525.81 1068.68,441.88 U1.1
  other v1: 358.27,90.55 677.17,122.05 433.07,181.1 233.59,311.09 265.09,311.09 296.58,311.09 737.53,311.09 769.03,311.09 800.52,311.09 595.8,401.64 387.14,480.38 418.63,480.38 450.13,480.38 272.96,685.1 338.58,700.79 641.67,1061.11
GPADC0: J2.67
LCD_SPI_RST: J2.68
LINEOUTP: J2.65
MCSI-CK_N: J2.45 P2.9 | length 212.5
  Top Layer w4.01: J2.45 374.23,222.1 380.32,216.01 380.32,198.99 cw(c374.31,198.99) 374.31,192.99 369.38,192.99 ccw(c369.38,186.98) 363.38,186.98 363.38,183.98 ccw(c369.38,183.98) 369.38,177.98 374.33,177.98 cw(c374.33,171.97) 378.58,176.22 396.37,158.43 396.37,154.62 396.37,108.73 394.02,106.38 390.7,106.38 377.89,119.18 P2.9
MCSI-CK_P: J2.43 P2.10 | length 216
  Top Layer w4.01: J2.43 393.91,222.1 387.83,216.01 387.83,177.59 403.88,161.54 403.88,99.34 391.71,87.16 391.71,53.2 P2.10
MCSI-D0_N: J2.57 P2.3 | length 216.3
  Top Layer w4.01: J2.57 256.12,222.1 261.61,216.6 262.21,216.01 262.21,201.59 cw(c257,201.59) 257,196.38 249.11,196.38 ccw(c249.11,191.18) 243.91,191.18 243.91,188.57 ccw(c249.11,188.57) 249.11,183.37 257,183.37 cw(c257,178.17) 262.21,178.17 262.21,174.48 268.18,168.51 278.26,158.43 278.26,108.73 275.91,106.38 272.59,106.38 259.78,119.18 P2.3
MCSI-D0_P: J2.55 P2.4 | length 216
  Top Layer w4.01: J2.55 275.8,222.1 269.72,216.01 269.72,177.59 285.77,161.54 285.77,99.34 273.6,87.16 273.6,53.2 P2.4
MCSI-D1_N: J2.49 P2.7 | length 213.3
  Top Layer w4.01: J2.49 334.86,222.1 329.67,216.91 328.77,216.01 328.77,207.42 ccw(c334.78,207.42) 334.78,201.42 341.76,201.42 cw(c341.76,195.41) 347.76,195.41 347.76,192.41 cw(c341.76,192.41) 341.76,186.41 334.78,186.41 ccw(c334.78,180.4) 328.77,180.4 328.77,175.26 320.04,166.53 320.04,163.39 320.04,108.73 322.39,106.38 325.71,106.38 338.52,119.18 P2.7
MCSI-D1_P: J2.51 P2.6 | length 213
  Top Layer w4.01: J2.51 315.17,222.1 321.26,216.01 321.26,178.37 312.53,169.64 312.53,99.34 319.37,92.5 324.7,87.16 324.7,77.79 324.7,53.2 P2.6
MCSI-MCLK: J2.34 P2.12 | length 702.3
  Top Layer w13.83: P2.12 437.9,48.29 437.9,79.79 449.74,91.62 549.15,91.62 562.93,105.4 562.93,133.95 637.73,208.75 637.73,279.62 482.5,434.85 J2.34
MCSI-PWDN: J2.26 P2.16 R4.2 | length 899.5
  Top Layer w3.5: P2.16 515.69,56.87 521.81,62.99 v1(531.5,62.99) ; J2.26 561.24,481.27 573.13,469.38 613.13,469.38 687.33,395.18 687.33,224.4 704.35,207.39 753.08,207.39 770.1,190.38 R4.2 777.97,162.49 v1(805.06,162.49)
  Bottom Layer w3.5: v1(531.5,62.99) 532.78,62.99 540.65,55.12 665.35,55.12 772.73,162.49 v1(805.06,162.49)
MCSI-RSTN: J2.28 P2.17 R6.2 | length 726.2
  Top Layer w3.5: P2.17 536.36,136.9 v1(536.36,184.14) ; J2.28 541.55,480.96 568.13,454.38 608.13,454.38 663.13,399.38 663.13,230.29 720.1,173.32 R6.2 ; v1(686.01,174.62) 690.27,170.36 R6.2 ; R6.2@710.04,157.35 720.1,167.41 R6.2
  Bottom Layer w3.5: v1(536.36,184.14) 676.49,184.14 v1(686.01,174.62)
MICIN1N: J2.63
MICIN1P: J2.61
NetD2_2: D2.2 R10.1 | length 50
  Top Layer w5: D2.2@956,643.18 R10.1
NetJ5_1: J5.1 U2.2 | length 80.5
  Top Layer w10: J5.1 1295.21,1234.31 U2.2@1299.21,1230.32
NetR11_1: R11.1 U2.34 | length 127.3
  Top Layer w5: v1(1314.96,858.27) 1314.96,841.76 1333.19,823.53 U2.34
  Bottom Layer w5: v1(1314.96,858.27) R11.1
PH0: J2.69
PH1: J2.71
PH2: J2.73
PH3: J2.75
PH6: J2.66
PH7: J2.64
PH8: J2.62
PH13: J2.52
SDC0-CLK: J2.6 J4.5 | length 515.6
  Top Layer w3.5: J4.5 693.64,1028.29 758.09,963.84 J2.6
SDC0-CMD: J2.20 J4.3 | length 429
  Top Layer w3.5: J2.20 620.12,544.12 620.12,877.26 684.54,941.68 J4.3
SDC0-D0: J2.22 J4.7 | length 629
  Top Layer w3.5: J2.22 600.61,1062.87 634.9,1097.16 671.34,1097.16 J4.7
SDC0-D1: J2.24 J4.8 | length 677.2
  Top Layer w3.5: J2.24 580.92,1080.92 658.21,1158.21 J4.8
SDC0-D2: J2.8 J4.1 | length 347.2
  Top Layer w3.5: J4.1 692.54,851.62 719.25,851.62 738.4,832.46 J2.8
SDC0-D3: J2.10 J4.2 | length 408.3
  Top Layer w3.5: J4.2 677.81,887.09 662.68,887.09 649.61,874.02 649.61,787.4 718.72,718.29 J2.10
SDC0-DET: J2.4 J4.CD1 | length 705.3
  Top Layer w3.5: J4.CD1 699.66,1190.95 718.5,1190.95 774.37,1135.08 774.37,547.35 J2.4
State_LED: J2.50
TWI1-SCK: J2.35 P2.14 R3.2 | length 580.3
  Top Layer w3.5: v1(472.1,203.85) 472.1,246.15 J2.35 ; P2.14 476.32,60.81 478.5,62.99 v1(492.13,62.99) ; v1(807.09,62.99) 822.82,62.99 R3.2
  Bottom Layer w3.5: v1(472.1,203.85) 472.1,81.46 490.56,62.99 v1(492.13,62.99) 510.94,44.18 788.28,44.18 v1(807.09,62.99)
TWI1-SDA: J2.33 P2.15 R5.2 | length 402.9
  Top Layer w3.5: J2.33 496.5,242.55 496.5,206.29 496.99,205.8 496.99,136.9 P2.15 ; v1(673.23,94.49) 700.79,66.93 721.28,66.93 R5.2
  Bottom Layer w3.5: v1(496.99,182.18) 496.99,156.56 539.37,114.17 653.54,114.17 v1(673.23,94.49)
TWI2_SCK: J2.56
TWI2_SDA: J2.54
UART1_RX: J2.30 J3.10 | length 767.7
  Top Layer w3.5: J2.30 523.62,542.19 v1(523.62,492.13)
  Bottom Layer w3.5: v1(523.62,492.13) 759.84,492.13 1051.18,783.46 J3.10@1118.11,783.46
UART1_TX: J2.32 J3.8 | length 812.8
  Top Layer w3.5: J2.32 503.94,542.19 v1(503.94,468.5)
  Bottom Layer w3.5: v1(503.94,468.5) 775.59,468.5 1071.23,764.14 J3.8
USB0__N: J2.37 R1.1 | length 86.3
  Top Layer w8.56: J2.37 453.73,247.46 453.73,294.62 v1(454.49,295.38)
  Bottom Layer w8.56: v1(454.49,295.38) 456.24,297.13 456.24,311.9 468.13,323.79 R1.1
USB0__P: J2.39 R2.1 | length 86.3
  Top Layer w8.56: v1(431.77,295.38) 432.53,294.62 432.53,247.46 J2.39
  Bottom Layer w8.56: R2.1 418.13,323.79 430.02,311.9 430.02,297.13 v1(431.77,295.38)
USB0_N: J8.3 R1.2 | length 1313
  Bottom Layer w8.56: R1.2 468.13,374.97 440.32,402.78 440.32,405.16 416.5,428.97 328.15,428.97 309.27,447.85 309.27,759.42 399.12,849.26 607.06,849.26 689.41,931.62 689.41,1086.92 757.15,1154.66 757.15,1232.41 757.74,1233 757.74,1259.84
USB0_P: J8.1 R2.2 | length 1335.6
  Bottom Layer w8.56: R2.2 418.13,410.29 411.51,416.91 323.15,416.91 297.21,442.85 297.21,764.41 394.12,861.33 602.06,861.33 677.35,936.61 677.35,1040.41 677.35,1044.69 ccw(c668.78,1044.69) 668.78,1053.26 668.69,1053.26 cw(c668.69,1061.54) 660.41,1061.54 cw(c668.69,1061.54) 668.69,1069.82 668.78,1069.82 ccw(c668.78,1078.38) 677.35,1078.38 677.35,1091.92 691.46,1106.03 744.45,1159.02 744.45,1165 744.45,1169.28 ccw(c735.88,1169.28) 735.88,1177.85 735.79,1177.85 cw(c735.79,1186.13) 727.51,1186.13 cw(c735.79,1186.13) 735.79,1194.41 735.88,1194.41 ccw(c735.88,1202.98) 744.45,1202.98 744.45,1231.38 J8.1
V831_LCD_CLK: J2.7
V831_LCD_D3: J2.31
V831_LCD_D4: J2.29
V831_LCD_D5: J2.27
V831_LCD_D6: J2.25
V831_LCD_D7: J2.23
V831_LCD_D10: J2.21
V831_LCD_D11: J2.11
V831_LCD_D12: J2.9
V831_LCD_DE: J2.5
V831_LCD_HSYNC: J2.3
V831_LCD_VSYNC: J2.1
WIFI_REG_ON: J2.70 R12.2 U2.12 | length 1352.5
  Top Layer w5: J2.70 129.04,544.82 129.04,597.55 314.96,783.46 v1(444.88,783.46) ; U2.12 925.83,1177.17 v1(972.44,1177.17)
  Bottom Layer w5: v1(444.88,783.46) 670.5,783.46 736.22,849.19 736.22,1003.94 909.45,1177.17 v1(972.44,1177.17) 991.61,1158 R12.2
WIFI_WAKEHOST: R13.2 U2.13 | length 131.7
  Top Layer w5: U2.13 925.83,1141.73 v1(972.44,1141.73)
  Bottom Layer w5: v1(972.44,1141.73) 1009.17,1105 R13.2
WL-SDIO-CLK: J2.48 U2.17 | length 1029.3
  Top Layer w5: J2.48 346.15,545.4 346.15,650.07 v1(347.6,651.51) ; U2.17 925.83,1000 v1(972.44,1000)
  Bottom Layer w5: v1(347.6,651.51) 749.94,651.51 870.08,771.65 870.08,948.82 921.26,1000 v1(972.44,1000)
WL-SDIO-CMD: J2.46 U2.16 | length 1042.3
  Top Layer w5: J2.46 365.26,544.82 365.26,680.23 v1(366.14,681.1) ; U2.16 925.83,1035.43 v1(972.44,1035.43)
  Bottom Layer w5: v1(366.14,681.1) 736.22,681.1 842.52,787.4 842.52,964.57 913.39,1035.43 v1(972.44,1035.43)
WL-SDIO-D0: J2.44 U2.18 | length 962.9
  Top Layer w5: v1(382.98,624.89) 382.98,545.04 J2.44 ; U2.18 925.83,964.57 v1(972.44,964.57)
  Bottom Layer w5: v1(382.98,624.89) 770.56,624.89 897.64,751.97 897.64,929.13 933.07,964.57 v1(972.44,964.57)
WL-SDIO-D1: J2.42 U2.19 | length 912.8
  Top Layer w5: J2.42 v1(403.76,600.61) ; U2.19 925.83,929.13 v1(972.44,929.13)
  Bottom Layer w5: v1(403.76,600.61) 789.58,600.61 925.14,736.16 925.14,913.32 940.94,929.13 v1(972.44,929.13)
WL-SDIO-D2: J2.38 U2.14 | length 1029.3
  Top Layer w5: v1(440.94,748.03) 442.04,746.94 442.04,545.04 J2.38 ; U2.14 925.83,1106.3 v1(972.44,1106.3)
  Bottom Layer w5: v1(440.94,748.03) 700.79,748.03 783.46,830.71 783.46,996.06 893.7,1106.3 v1(972.44,1106.3)
WL-SDIO-D3: J2.40 U2.15 | length 1023.9
  Top Layer w5: v1(417.32,716.54) 417.32,713.09 423.44,706.97 J2.40 ; U2.15 925.83,1070.87 v1(972.44,1070.87)
  Bottom Layer w5: v1(417.32,716.54) 417.73,716.95 721.14,716.95 814.96,810.77 814.96,980.31 905.51,1070.87 v1(972.44,1070.87)
WS2812: J6.2 J8.9 | length 1625.2
  Top Layer w5: v1(1288.96,497.39) 1291.39,499.82 1297.54,499.82 1309.53,511.81 J6.2
  Bottom Layer w5: J8.9 862.2,1220.47 1446.85,1220.47 1507.2,1160.12 1507.2,519.51 1485.08,497.39 v1(1288.96,497.39)
pads on no net: "J2. " J2.36 J2.72 J2.SH1 J2.SH2 J4. J4.MP4 P2.5 U2.4 U2.5 U2.6 U2.7 U2.8 U2.10 U2.11 U2.21 U2.23 U2.24 U2.25 U2.26 U2.27 U2.28 U2.29 U2.30 U2.32 U2.35 U2.37 U2.38 U2.39 U2.40 U2.41 U2.42 U2.43 U2.44

## Polygon pours and split planes (outlines as drawn)
GND on Top Layer "GND_L01_P007" (solid, remove dead copper, pour order 7): 0,196.85 0,1291.34 cw(c196.85,1291.34) 196.85,1488.19 1370.08,1488.19 cw(c1370.08,1291.34) 1566.93,1291.34 1566.93,196.85 cw(c1370.08,196.85) 1370.08,0 196.85,0 cw(c196.85,196.85)
GND on Int1 (GND) "GND_L02_P008" (solid, remove dead copper, pour order 8): 0,196.85 0,1291.34 cw(c196.85,1291.34) 196.85,1488.19 1370.08,1488.19 cw(c1370.08,1291.34) 1566.93,1291.34 1566.93,196.85 cw(c1370.08,196.85) 1370.08,0 196.85,0 cw(c196.85,196.85)
GND on Bottom Layer "GND_L04_P010" (solid, remove dead copper, pour order 10): 0,196.85 0,1291.34 cw(c196.85,1291.34) 196.85,1488.19 1370.08,1488.19 cw(c1370.08,1291.34) 1566.93,1291.34 1566.93,196.85 cw(c1370.08,196.85) 1370.08,0 196.85,0 cw(c196.85,196.85)
3V3 on Int2 (PWR) "3V3_L03_P009" (solid, remove dead copper, pour order 9): 0,196.85 0,1291.34 cw(c196.85,1291.34) 196.85,1488.19 1370.08,1488.19 cw(c1370.08,1291.34) 1566.93,1291.34 1566.93,196.85 cw(c1370.08,196.85) 1370.08,0 196.85,0 cw(c196.85,196.85)

## Other copper
Top Layer:
  region net BAT: 1346.46,287.4 1251.97,287.4 1251.97,354.33 1346.46,354.33
  region net 5V: 90.55,513.78 19.68,513.78 19.68,748.03 90.55,748.03
Int2 (PWR):
  region net 5V: 681.1,1396.41 736.22,1396.41 736.22,1464.57 681.1,1464.57
  region net 5V: 90.55,602.36 19.68,602.36 19.68,748.03 90.55,748.03
Bottom Layer:
  region net BAT: 1254.92,748.03 1254.92,688.98 1295.28,688.98 1295.28,748.03
  region net 5V: 681.1,1437.01 681.1,1397.64 770.18,1397.64 770.18,1437.01
  region net 3V3: 782.48,1437.01 782.48,1397.64 895.67,1397.64 895.67,1437.01

## Silkscreen, mask and mechanical layers (free items; w line width, h text height)
Mechanical 1:
  lines w0.5: 275.59,1488.19 1291.34,1488.19 ; 0,196.85 ccw(c196.85,196.85) 196.85,0 1370.08,0 ccw(c1370.08,196.85) 1566.93,196.85 1566.93,1291.34 ccw(c1370.08,1291.34) 1370.08,1488.19 196.85,1488.19 ccw(c196.85,1291.34) 0,1291.34 0,196.85

## Text inside footprints (layer, text, board x,y; h text height)
J2: Mechanical 9 "NGFF-67P_B" at 482.5,424.85 h20 r180; Mechanical 8 "11" at 699.82,214.7 h20 r180; Mechanical 8 "9" at 719.51,230.7 h20 r180; Mechanical 8 "31" at 483.28,214.7 h20 r180; Mechanical 8 "51" at 286.43,214.7 h20 r180; Mechanical 8 "39" at 404.54,214.7 h20 r180; Mechanical 8 "37" at 424.23,214.7 h20 r180; Mechanical 8 "30" at 493.13,511.95 h20 r180; Mechanical 8 "10" at 709.66,511.95 h20 r180; Mechanical 8 "SH1" at 821.87,229.22 h20 r180; Mechanical 8 "6" at 749.03,527.95 h20 r180; Mechanical 8 "8" at 729.35,527.95 h20 r180; Mechanical 8 "7" at 739.19,230.7 h20 r180; Mechanical 8 "5" at 758.88,230.7 h20 r180; Mechanical 8 "SH2" at 6.91,229.22 h20 r180; Mechanical 8 "49" at 306.12,214.7 h20 r180; Mechanical 8 "33" at 463.6,214.7 h20 r180; Mechanical 8 "35" at 443.91,214.7 h20 r180; Mechanical 8 "42" at 375.02,511.95 h20 r180; Mechanical 8 "29" at 502.97,214.7 h20 r180; Mechanical 8 "47" at 325.8,214.7 h20 r180; Mechanical 8 "45" at 345.49,214.7 h20 r180; Mechanical 8 "43" at 365.17,214.7 h20 r180; Mechanical 8 "41" at 384.86,214.7 h20 r180; Mechanical 8 "67" at 128.95,214.7 h20 r180; Mechanical 8 "65" at 148.64,214.7 h20 r180; Mechanical 8 "61" at 188.01,214.7 h20 r180; Mechanical 8 "63" at 168.32,214.7 h20 r180; Mechanical 8 "57" at 227.38,214.7 h20 r180; Mechanical 8 "59" at 207.69,214.7 h20 r180; Mechanical 8 "55" at 247.06,214.7 h20 r180; Mechanical 8 "53" at 266.75,214.7 h20 r180; Mechanical 8 "68" at 119.11,511.95 h20 r180; Mechanical 8 "52" at 276.59,511.95 h20 r180; Mechanical 8 "64" at 158.48,511.95 h20 r180; Mechanical 8 "66" at 138.8,511.95 h20 r180; Mechanical 8 "60" at 197.85,511.95 h20 r180; Mechanical 8 "62" at 178.17,511.95 h20 r180; Mechanical 8 "50" at 296.28,511.95 h20 r180; Mechanical 8 "48" at 315.96,511.95 h20 r180; Mechanical 8 "54" at 256.91,511.95 h20 r180; Mechanical 8 "70" at 99.43,511.95 h20 r180; Mechanical 8 "58" at 217.54,511.95 h20 r180; Mechanical 8 "56" at 237.22,511.95 h20 r180; Mechanical 8 "71" at 89.58,214.7 h20 r180; Mechanical 8 "69" at 109.27,214.7 h20 r180; Mechanical 8 "2" at 788.4,527.95 h20 r180; Mechanical 8 "3" at 778.56,230.7 h20 r180; Mechanical 8 "1" at 798.25,230.7 h20 r180; Mechanical 8 "4" at 768.72,527.95 h20 r180; Mechanical 8 "73" at 69.9,214.7 h20 r180; Mechanical 8 "75" at 50.21,214.7 h20 r180; Mechanical 8 "32" at 473.44,511.95 h20 r180; Mechanical 8 "34" at 453.76,511.95 h20 r180; Mechanical 8 "72" at 79.74,511.95 h20 r180; Mechanical 8 "74" at 60.06,511.95 h20 r180; Mechanical 8 "46" at 335.65,511.95 h20 r180; Mechanical 8 "24" at 552.18,511.95 h20 r180; Mechanical 8 "26" at 532.5,511.95 h20 r180; Mechanical 8 "44" at 355.33,511.95 h20 r180; Mechanical 8 "27" at 522.66,214.7 h20 r180; Mechanical 8 "25" at 542.34,214.7 h20 r180; Mechanical 8 "23" at 562.03,214.7 h20 r180; Mechanical 8 "21" at 581.71,214.7 h20 r180; Mechanical 8 "40" at 394.7,511.95 h20 r180; Mechanical 8 "20" at 591.55,511.95 h20 r180; Mechanical 8 "22" at 571.87,511.95 h20 r180; Mechanical 8 "28" at 512.81,511.95 h20 r180; Mechanical 8 "36" at 434.07,511.95 h20 r180; Mechanical 8 "38" at 414.39,511.95 h20 r180